# Altium PCB PCB1.PcbDoc
Units mm, origin at the board's own origin, x right, y up, seen from the top; angles counter-clockwise.
Board outline 152.4 x 101.6 mm, 4 copper layers (Top Layer, Int1 (GND), Int2 (PWR), Bottom Layer), stack 1.578 mm thick; 124 components, 98 nets, 497 pads, 2 vias.
Unrouted connection lines stored in the file: 278.
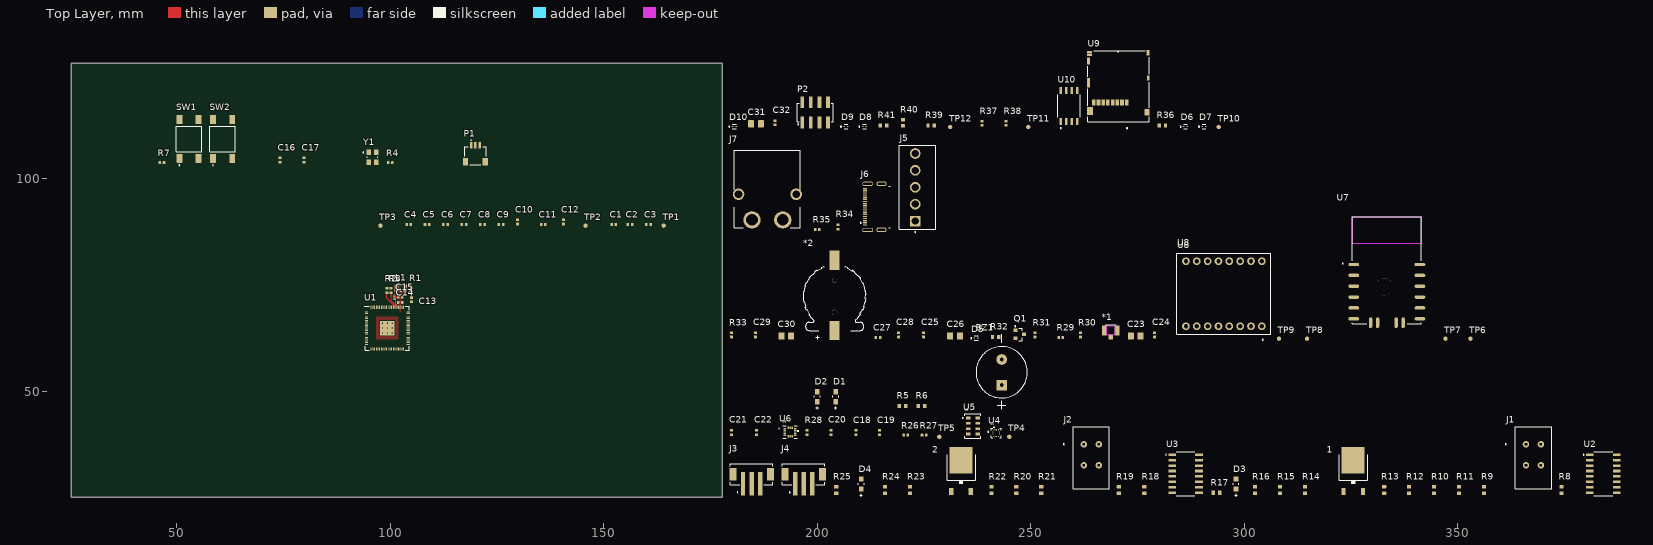
[diagram p0: Top Layer view]
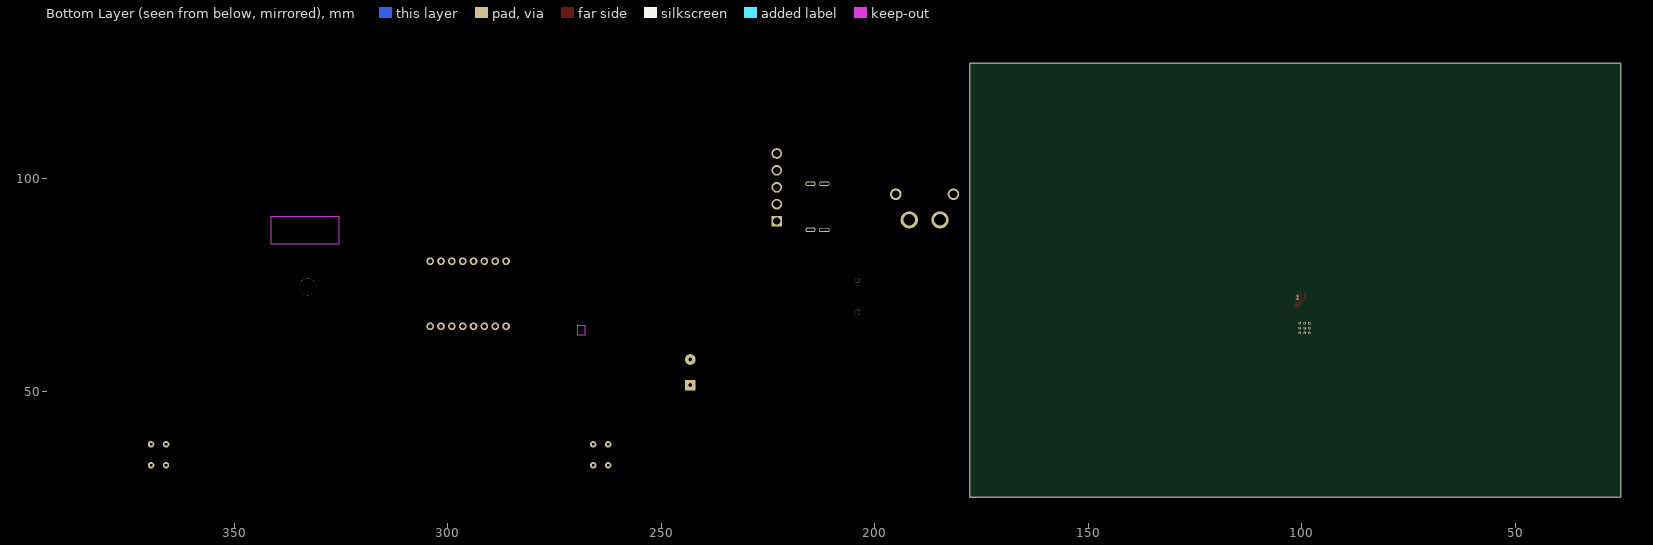
[diagram p1: Bottom Layer view, seen from below]

## Layer stack, top to bottom
Top Solder: solder mask 0.0254, SM-001, Dk 4
Top Layer: signal copper 0.035
Dielectric 1: prepreg 0.107, PP-017, Dk 4.1
Dielectric 2: prepreg 0.0994, PP-017, Dk 4.1
Int1 (GND): signal copper 0.0152
Dielectric 3: core 1.065, Core-039, Dk 4.6
Int2 (PWR): signal copper 0.0152
Dielectric 4: prepreg 0.0994, PP-017, Dk 4.1
Dielectric 5: prepreg 0.107, PP-017, Dk 4.1
Bottom Layer: signal copper 0.035
Bottom Solder: solder mask 0.0254, SM-001, Dk 4

## Board outline
25.4,25.4 177.8,25.4 177.8,127 25.4,127

## Design rules (kind name [scope] priority, off if disabled: settings)
BoardOutlineClearance [All] p1: gap=0.2 ignorepadtopadclearanceinfootprint=FALSE
Clearance [All] p1: gap=0.102 ignorepadtopadclearanceinfootprint=FALSE except(0.127: Arc-Via Track-Via SMDPad-Via THPad-Via Via-Via Via-Fill Via-Poly Via-Region Via-Text; 0.2: Fill-Fill Fill-Poly Fill-Region Poly-Poly Poly-Region Region-Region; 0.25: Arc-Hole Track-Hole SMDPad-Hole THPad-Hole Via-Hole Fill-Hole Poly-Hole Region-Hole Text-Hole)
ComponentClearance [All] p1: gap=0.102 collisioncheckmode=3 verticalgap=0.102 showdistances=TRUE
DiffPairsRouting [All] p1: maxlimit=0.102 minlimit=0.102 mostfreqgap=0.102 toplayer_minwidth=0.102 toplayer_maxwidth=1816.048 toplayer_prefwidth=0.102 midlayer1_minwidth=0.102 midlayer1_maxwidth=1816.048 midlayer1_prefwidth=0.102 midlayer2_minwidth=0.102 midlayer2_maxwidth=1816.048 midlayer2_prefwidth=0.102 bottomlayer_minwidth=0.102 bottomlayer_maxwidth=1816.048 bottomlayer_prefwidth=0.102 maxuncoupledlength=12.7
Height [All] p1: minheight=0 maxheight=1816.048 prefheight=12.7
HoleSize [All] p1: absolutevalues=TRUE maxlimit=6.3 minlimit=0.2 maxpercent=80.000 minpercent=20.000
HoleToHoleClearance [All] p1: gap=0.25 allowstackedmicrovias=FALSE
MinimumAnnularRing [All] p1: minimumring=0.076
MinimumSolderMaskSliver [All] p1: minsoldermaskwidth=0
PlaneClearance [All] p1: clearance=0.102
PlaneConnect PlaneConnectPowerPads [InPadClass('PowerPads')] p1: planeconnectstyle=Direct reliefexpansion=0.508 reliefentries=4 reliefconductorwidth=0.254 reliefairgap=0.254
PlaneConnect [All] p2: pad.planeconnectstyle=Relief pad.reliefexpansion=0.3 pad.reliefentries=4 pad.reliefconductorwidth=0.102 pad.reliefairgap=0.102 via.planeconnectstyle=Direct via.reliefexpansion=0.3 via.reliefentries=4 via.reliefconductorwidth=0.127 via.reliefairgap=0.127
PolygonConnect PolygonConnectPowerPads [All vs (InPadClass('PowerPads'))] p1: connectstyle=Direct reliefconductorwidth=0.254 reliefentries=4 polygonreliefangle="90 Angle" airgapwidth=0.254
PolygonConnect [All] p2: thpad.connectstyle=Relief thpad.reliefconductorwidth=0.102 thpad.reliefentries=4 thpad.polygonreliefangle="90 Angle" thpad.airgapwidth=0.102 smdpad.connectstyle=Direct smdpad.reliefconductorwidth=0.102 smdpad.reliefentries=4 smdpad.polygonreliefangle="90 Angle" smdpad.airgapwidth=0.102 via.connectstyle=Direct via.reliefconductorwidth=0.127 via.reliefentries=4 via.polygonreliefangle="90 Angle" via.airgapwidth=0.127
RoutingVias [All] p1: holewidth=0.2 width=0.45 viastyle="Through Hole" minholewidth=0.2 minwidth=0.45 maxholewidth=6.3 maxwidth=6.55
SilkToSilkClearance [All] p1: silktosilkclearance=0
SilkToSolderMaskClearance [IsPad] p1: minsilkscreentomaskgap=0.102 clearancetoexposedcopper=TRUE
SolderMaskExpansion [All] p1: expansion=0.075 istentingtop=FALSE
SupplyNets "Schematic Supply Nets_5" [InNet('+BATT')] p1: voltage=0.000
SupplyNets "Schematic Supply Nets_4" [InNet('+5')] p2: voltage=0.000
SupplyNets "Schematic Supply Nets_3" [InNet('GND')] p3: voltage=0.000
SupplyNets "Schematic Supply Nets_2" [InNet('+5H')] p4: voltage=0.000
SupplyNets "Schematic Supply Nets_1" [InNet('+1V1')] p5: voltage=0.000
SupplyNets "Schematic Supply Nets" [InNet('+3V3')] p6: voltage=0.000
Width [All] p1: maxlimit=1816.048 minlimit=0.102 preferedwidth=0.254 midlayer1_prefwidth=0.102 midlayer2_prefwidth=0.102 minimp=50.000000 maximp=50.000000 favimp=50.000000
20 further rules are at their usual default settings.

## Classes and differential pairs
component class storage: C23 C24 D9 D10 P2 R11 R22 R34 R37 R38 R41 TP10 TP11 TP12 U3 U9
component class Sheet2: J5 J6 J7 R34 R41
component class Sheet1: *2 C22 C23 C24 C26 D9 Q1 R15 R18 R19 R30 R31 TP6 TP7 TP9 U1 U7 U8
component class Microcontroller: BZ1 C1 C2 C3 C4 C5 C6 C7 C8 C9 C10 C11 C12 C13 C14 C15 C16 C17 D1 D2 L1 P1 R1 R2 R3 R4 R5 R6 R7 SW1 SW2 TP1 TP2 TP3 U1 Y1
component class MCU_SLAVES: C18 C19 C20 C21 C22 R12 R27 R28 TP4 TP5 U7 U8
component class "Firing channels": 1 2 D3 D10 J1 J2 J3 J4 R11 R12 R15 R16 R18 R19 R22 R23 R27 R28 R31 R34 R37 R41 U2 U3
differential pair USB_D: +USB_D_P -USB_D_N
differential pair MCU_USB_D: +MCU_USB_D_P -MCU_USB_D_N

## Components (designator, comment, footprint, x,y, rotation, side; value= is the part's Value field where it differs from the comment)
1 "" IRLR7843 325.12,31.242 r0 top
2 "IRL_MOSFET" IRLR7843 233.299,31.242 r0 top
*1 "ufl" UFL 268.605,64.135 r0 top
*2 "CR1202_HOLDER" CR1220_CELL_HOLDER 206.883,69.342 r0 top
BZ1 "Buzzer_Active_THT" Buzzer_Active_Tht 243.205,54.61 r90 top
C1 "100n" CAP_0402#1 152.375,89.197 r0 top
C2 "4.7u" CAP_0402#1 156.185,89.197 r0 top
C3 "100n" CAP_0402#1 160.503,89.197 r0 top
C4 "100n" CAP_0402#1 104.369,89.197 r0 top
C5 "100n" CAP_0402#1 108.687,89.197 r0 top
C6 "100n" CAP_0402#1 113.005,89.197 r0 top
C7 "100n" CAP_0402#1 117.323,89.197 r0 top
C8 "100n" CAP_0402#1 121.641,89.197 r0 top
C9 "100n" CAP_0402#1 125.959,89.197 r0 top
C10 "100n" CAP_0402#1 129.896,89.832 r90 top
C11 "100n" CAP_0402#1 135.865,89.197 r0 top
C12 "100n" CAP_0402#1 140.564,89.832 r90 top
C13 "4.7u" CAP_0402#1 105.029,71.62 r270 top
C14 "4.7u" CAP_0402#2 102.4,71 r0 top
C15 "4.7u" CAP_0402#1 102.375,72.225 r0 top
C16 "C0402" CAP_0402#1 74.27,104.31 r90 top
C17 "C0402" CAP_0402#1 79.858,104.31 r90 top
C18 "100nf" CAP_0402#1 209.042,40.513 r90 top
C19 "100nf" CAP_0402#1 214.63,40.513 r90 top
C20 "100nf" CAP_0402#1 203.2,40.513 r90 top
C21 "100nf" CAP_0402#1 179.959,40.513 r90 top
C22 "100nf" CAP_0402#1 185.801,40.513 r90 top
C23 "10u" CAP_0805 274.574,63.119 r0 top
C24 "100nf" CAP_0402#1 279.019,63.373 r90 top
C25 "100nf" CAP_0402#1 224.917,63.373 r90 top
C26 "10uf" CAP_0805 232.283,63.119 r0 top
C27 "DNP" CAP_0402#1 214.249,62.738 r0 top
C28 "DNP" CAP_0402#1 219.075,63.373 r90 top
C29 "100nf" CAP_0402#1 185.547,63.373 r90 top
C30 "4.7uf" CAP_0805 192.786,63.119 r0 top
C31 "1uf" CAP_0805 185.674,112.776 r0 top
C32 "100nf" CAP_0402#1 190.119,113.03 r90 top
D1 "APT2012MGC" FP-APT2012MGC-MFG 204.343,48.895 r90 top
D2 "APT2012MGC" FP-APT2012MGC-MFG 200.025,48.895 r90 top
D3 "APT2012MGC" FP-APT2012MGC-MFG 298.069,28.448 r90 top
D4 "APT2012MGC" FP-APT2012MGC-MFG 210.312,28.448 r90 top
D5 "ESD9L5.0ST5G" On_Semiconductor_514AB_MFG 237.236,62.611 r0 top
D6 "ESD9L5.0ST5G" On_Semiconductor_514AB_MFG 286.258,112.141 r0 top
D7 "ESD9L5.0ST5G" On_Semiconductor_514AB_MFG 290.576,112.141 r0 top
D8 "ESD9L5.0ST5G" On_Semiconductor_514AB_MFG 211.074,112.141 r0 top
D9 "ESD9L5.0ST5G" On_Semiconductor_514AB_MFG 206.756,112.141 r0 top
D10 "ESD9L5.0ST5G" On_Semiconductor_514AB_MFG 180.594,112.141 r0 top
J1 "WAGO_2_PIN_CONNECTOR" WAGO_CONNECTOR 368.046,33.782 r0 top
J2 "WAGO_2_PIN_CONNECTOR" WAGO_CONNECTOR 264.541,33.782 r0 top
J3 "3_PIN_JST_PH_SERVO" 3_PIN_JST_PH_SERVO 184.912,29.718 r0 top
J4 "3_PIN_JST_PH_SERVO" 3_PIN_JST_PH_SERVO 197.104,29.718 r0 top
J5 "B5P-VH-B(LF)(SN)" FP-B5P-VH-B_LF_SN-MFG 223.52,97.917 r90 top
J6 "CX90M-16P" FP-CX90M-16P-MFG 214.249,93.345 r90 top
J7 "XT60PW-M" XT60PWM 188.341,90.297 r0 top
L1 "3.3uH" IND-SMD_L2.0-W1.6_AOTA-B201610S3R3-101-T 102.5,74.35 r180 top
P1 "SM03B-SRSS-TB(LF)(SN)" JST-SM03B-SRSS-TB_V 119.99,105.326 r0 top
P2 "621008245821" 621008245821 199.517,115.443 r0 top
Q1 "BC817-40LT1G" ONSC-SOT-23-3-318-08_V 247.396,63.5 r0 top
R1 "33" RES_0402 105.029,73.914 r90 top
R2 "27" RES_0402 99.25,73.775 r270 top
R3 "27" RES_0402 100.25,73.775 r270 top
R4 "1k" RES_0402 100.051,103.675 r0 top
R5 "R0603" RES_0603 219.964,46.736 r0 top
R6 "R0603" RES_0603 224.409,46.736 r0 top
R7 "1k" RES_0402 46.584,103.675 r0 top
R8 "R0603" RES_0603 374.269,27.051 r90 top
R9 "R0603" RES_0603 356.108,27.051 r90 top
R10 "R0603" RES_0603 344.424,27.051 r90 top
R11 "R0603" RES_0603 350.266,27.051 r90 top
R12 "R0603" RES_0603 338.582,27.051 r90 top
R13 "1k" RES_0603 332.74,27.051 r90 top
R14 "R0603" RES_0603 314.198,27.051 r90 top
R15 "R0603" RES_0603 308.356,27.051 r90 top
R16 "100" RES_0603 302.514,27.051 r90 top
R17 "10k" RES_0603 293.497,26.416 r0 top
R18 "R0603" RES_0603 276.606,27.051 r90 top
R19 "R0603" RES_0603 270.637,27.051 r90 top
R20 "R0603" RES_0603 246.634,27.051 r90 top
R21 "R0603" RES_0603 252.476,27.051 r90 top
R22 "1k" RES_0603 240.792,27.051 r90 top
R23 "R0603" RES_0603 221.742,27.051 r90 top
R24 "100" RES_0603 215.9,27.051 r90 top
R25 "10k" RES_0603 204.47,27.051 r90 top
R26 "10k" RES_0402 220.726,39.878 r0 top
R27 "10k" RES_0402 225.044,39.878 r0 top
R28 "10k" RES_0402 197.612,40.513 r90 top
R29 "0 ohm" RES_0402 257.048,62.738 r0 top
R30 "0 ohm" RES_0402 261.62,63.373 r90 top
R31 "4.7k" RES_0402 250.952,63.373 r90 top
R32 "0ohm-NM" RES_0603 241.808,62.865 r0 top
R33 "47k" RES_0402 179.959,63.373 r90 top
R34 "5K1" RES_0402 204.851,88.646 r90 top
R35 "5K1" RES_0402 200.025,88.011 r0 top
R36 "10k" RES_0603 280.797,112.395 r0 top
R37 "1k" RES_0402 238.633,112.903 r90 top
R38 "DNF" RES_0402 244.221,112.903 r90 top
R39 "22 ohm" RES_0603 226.695,112.395 r0 top
R40 "22 ohm" RES_0603 220.091,113.03 r90 top
R41 "22 ohm" RES_0603 215.519,112.395 r0 top
SW1 "FSM4JSMA" TE_FSM4JSMA 52.934,109.263 r90 top
SW2 "FSM4JSMA" TE_FSM4JSMA 60.808,109.263 r90 top
TP1 "TEST_POINT_RND_1MM" PAD_RND_1MM 164.059,88.943 r90 top
TP2 "TEST_POINT_RND_1MM" PAD_RND_1MM 145.771,88.943 r90 top
TP3 "TEST_POINT_RND_1MM" PAD_RND_1MM 97.765,88.943 r90 top
TP4 "TEST_POINT_RND_1MM" PAD_RND_1MM 244.983,39.497 r90 top
TP5 "TEST_POINT_RND_1MM" PAD_RND_1MM 228.6,39.497 r90 top
TP6 "TEST_POINT_RND_1MM" PAD_RND_1MM 352.933,62.484 r90 top
TP7 "TEST_POINT_RND_1MM" PAD_RND_1MM 347.091,62.484 r90 top
TP8 "TEST_POINT_RND_1MM" PAD_RND_1MM 314.706,62.484 r90 top
TP9 "TEST_POINT_RND_1MM" PAD_RND_1MM 308.102,62.484 r90 top
TP10 "TEST_POINT_RND_1MM" PAD_RND_1MM 294.005,112.014 r90 top
TP11 "TEST_POINT_RND_1MM" PAD_RND_1MM 249.428,112.014 r90 top
TP12 "TEST_POINT_RND_1MM" PAD_RND_1MM 231.14,112.014 r90 top
U1 "RP2350_80QFN" RP2350-QFN-80-1EP_10x10_P0.4mm_EP3.4x3.4mm_ThermalVias 99.379,64.962 r0 top
U2 "TLP281-4_OPTOCOUPLER" TLP281-4_OPTOCOUPLER 383.286,29.083 r0 top
U3 "TLP281-4_OPTOCOUPLER" TLP281-4_OPTOCOUPLER 285.496,29.083 r0 top
U4 "BMP390" BMP390 242.062,40.386 r0 top
U5 "MS5611" MS5611 236.728,41.021 r0 top
U6 "LSM6DSO32TR" LSM6DSO32TR 194.183,40.386 r0 top
U7 "L89HAS90" XCVR_L89HAS90 333.375,78.486 r0 top
U8 "LORA_SX1262_HF" LORA_SX1262_HF 284.226,63.5 r0 top
U9 "SD CARD SOCKET" "SD CARD SOCKET" 272.034,116.84 r0 top
U10 "W25Q128JVSIQ" SOIC127P790X216-8N 258.953,116.967 r90 top
Y1 "ABM8-272-T3" XTAL_ABM8-272-T3 95.86,104.945 r0 top

## Footprints (in the part's own frame and the unit in brackets; to place one, negate y for a bottom-side part, rotate by r counter-clockwise, add the part's x,y. Pads: shape width x height; smd on the part's side, far side on the other; paste and mask are expansions set on the pad)
3_PIN_JST_PH_SERVO [mm]
  rect 1x5.5 smd: 1(-2.254,-1.234) 2(-0.254,-1.234) 3(1.746,-1.234)
  rect 1.6x3 smd: S1(-4.654,1.016) S2(4.146,1.016)
  silkscreen extent -5.23,-3.33 4.72,3.52, body extent -5.23,-1.48 4.72,5.52, height 6.6
621008245821 [mm] "Pin Header, pitch 2.00 mm, SMD, Vertical, dual row, 8p"
  rect 0.89x2.75 smd: 1(-3,-2.375) 2(-3,2.375) 3(-1,-2.375) 4(-1,2.375) 5(1,-2.375) 6(1,2.375) 7(3,-2.375) 8(3,2.375)
  silkscreen extent -4.2,-2.9 4.2,2.12, body extent -4,-3.1 4,3.1, height 4.7
BMP390 [mil]
  rect 11x10 smd paste+0 mask+0: 1(-36,9.84) 2(-36,-9.84) 6(26,-9.84) 7(26,9.84)
  rect 10x11 smd paste+0 mask+0: 3(-24.68,-31) 4(-5,-31) 5(14.68,-31) 8(14.68,31) 9(-5,31) 10(-24.68,31)
  silkscreen extent -85,-46 40,56, body extent -46,-41 36,41, height 32
Buzzer_Active_Tht [mm]
  rect 2.5x2.5 / inner round 2.5 / far side rect 2.5x2.5 hole 0.9: 1(-3,0) 1(-3,0)
  round 2.5 hole 0.9: 2(3,0) 2(3,0)
  silkscreen extent -8.69,-6 8.92,6
CAP_0402#1 [mm]
  rrect25% 0.6x0.7 smd: 1(-0.5,0) 2(0.5,0)
  body extent -0.5,-0.26 0.5,0.26, height 0.37
CAP_0402#2 [mm]
  rrect25% 0.6x0.7 smd mask+0: 1(-0.5,0) 22(0.5,0)
  body extent -0.5,-0.26 0.5,0.26, height 0.37
CAP_0805 [mm]
  rrect25% 1.4x1.7 smd: 1(-1.143,0) 2(1.143,0)
  body extent -1.15,-0.76 1.15,0.79, height 1.01
CR1220_CELL_HOLDER [mm]
  rect 2.3x4.5 smd: N(-2.794,11.473) P(-2.794,-4.927)
  round 1.3 hole 1.3 unplated: ""(-2.794,-0.677)
  round 1.05 hole 1.05 unplated: ""(-2.794,6.773)
  silkscreen extent -10.17,-6.95 4.58,10.01, body extent -10.17,-6.55 4.58,12.65, height 4.25
FP-APT2012MGC-MFG [mm]
  rect 1.25x1.1 smd paste+0 mask+0: 1(-1.175,0) 2(1.175,0)
  silkscreen extent -2.93,-0.67 0.18,0.67, body extent -1.9,-0.77 1.9,0.77, height 0.25
FP-B5P-VH-B_LF_SN-MFG [mm]
  rect 2.5x2.5 hole 1.65 paste-2539.97 mask+0: 1(-7.92,0.55)
  round 2.5 hole 1.65 paste-2539.97 mask+0: 2(-3.96,0.55) 3(0,0.55) 4(3.96,0.55) 5(7.92,0.55)
  silkscreen extent -10.59,-4.25 9.87,4.25, body extent -9.97,-4.35 9.97,4.35, height 0.25
FP-CX90M-16P-MFG [mm]
  rect 0.3x0.9 smd paste+0 mask+0: 1(-4.25,3.025) 2(4.25,3.025) A1(-3.75,3.025) A4(-2.75,3.025) A5(-1.75,3.025) A6(-0.75,3.025) A7(0.75,3.025) A8(1.75,3.025) A9(2.75,3.025) A12(3.75,3.025) B1(3.25,3.025) B4(2.25,3.025) B5(1.25,3.025) B6(0.25,3.025) B7(-0.25,3.025) B8(-1.25,3.025) B9(-2.25,3.025) B12(-3.25,3.025)
  rrect100% 1x2.55 hole 2.05 slot 0.5 at 0 deg paste-2539.97 mask+0: 3(-5.4,2.405) 4(5.4,2.405)
  rrect100% 1.1x2.4 hole 1.8 slot 0.5 at 0 deg paste-2539.97 mask+0: 5(-5.4,-0.825) 6(5.4,-0.825)
  silkscreen extent -4.87,-2.9 4.87,4.2, body extent -6.05,-3.37 6.05,3.78, height 0.25
IND-SMD_L2.0-W1.6_AOTA-B201610S3R3-101-T [mm]
  rect 1x1.6 smd paste+0 mask+0.05: 1(-1,0) 2(1,0)
  silkscreen extent -0.27,-0.8 1.03,1.23
IRLR7843 [mm]
  rect 1x1.6 smd: 1(-1.899,-4.546) 2(2.661,-4.546)
  rect 5.4x6.2 smd: 3(0.381,2.754)
  silkscreen extent -2.9,-2.77 3.66,4.09, body extent -4.57,-3.02 5.33,3.52, height 2.39
JST-SM03B-SRSS-TB_V [mm] "SMD, 3-Leads, Body 5x4.25mm, Pitch 1mm"
  rect 0.6x1.55 smd: 1(-1,2.45) 2(0,2.45) 3(1,2.45)
  rect 1.2x1.8 smd: MP1(-2.3,-1.425) MP2(2.3,-1.425)
  silkscreen extent -2.5,-2.12 2.5,3.67, body extent -2.5,-2.12 2.5,2.83, height 3.25
LORA_SX1262_HF [mm]
  round 1.8 hole 1: 1(19.89,1.88) 2(17.35,1.88) 3(14.81,1.88) 4(12.27,1.88) 5(9.73,1.88) 6(7.19,1.88) 7(4.65,1.88) 8(2.11,1.88) 9(19.89,17.12) 10(17.35,17.12) 11(14.81,17.12) 12(12.27,17.12) 13(9.73,17.12) 14(7.19,17.12) 15(4.65,17.12) 16(2.11,17.12)
  silkscreen extent 0,-1.4 22,19
LSM6DSO32TR [mil]
  rect 22.7x13.84 smd paste+0 mask+4: 1(-67.65,39.53) 2(-67.65,19.84) 3(-67.65,0.16) 4(-67.65,-19.53) 8(27.65,-19.53) 9(27.65,0.16) 10(27.65,19.84) 11(27.65,39.53)
  rect 13.84x22.7 smd paste+0 mask+4: 5(-39.69,-27.65) 6(-20,-27.65) 7(-0.31,-27.65) 12(-0.31,47.65) 13(-20,47.65) 14(-39.69,47.65)
  silkscreen extent -126,-46 57,66, body extent -81,-41 41,61, height 34
MS5611 [mil]
  rect 43x24 smd paste-12 mask+0: 1(-53.31,113.82) 2(-53.31,64.61) 3(-53.31,15.39) 4(-53.31,-33.82) 5(33.31,-33.82) 6(33.31,15.39) 7(33.31,64.61) 8(33.31,113.82)
  silkscreen extent -106,-74 64,154
On_Semiconductor_514AB_MFG [mm]
  rect 0.36x0.25 smd paste+0 mask+0: 1(-0.42,0) 2(0.42,0)
  silkscreen extent -1.3,-0.55 0.43,0.55, body extent -0.7,-0.43 0.7,0.43, height 0.25
ONSC-SOT-23-3-318-08_V [mm] "SOT23, 3-Leads, Body 2.92x1.3mm, Pitch 0.95mm"
  rect 0.9x0.8 smd: 1(-1,0.95) 2(-1,-0.95) 3(1,0)
  silkscreen extent -1.12,-1.46 0.65,2.02, body extent -0.65,-1.46 0.65,1.46, height 1.11
PAD_RND_1MM [mm]
  round 1 smd paste-0.5 mask+0: 1(0,0)
RES_0402 [mm]
  rrect25% 0.6x0.7 smd: 1(-0.5,0) 2(0.5,0)
  body extent -0.5,-0.25 0.5,0.25, height 0.3
RES_0603 [mm]
  rrect25% 0.8x1 smd: 1(-0.75,0) 2(0.75,0)
  body extent -0.8,-0.43 0.8,0.43, height 0.52
RP2350-QFN-80-1EP_10x10_P0.4mm_EP3.4x3.4mm_ThermalVias [mm]
  rrect25% 0.78x0.22 smd: 1(-4.897,3.8) 2(-4.897,3.4) 3(-4.897,3) 4(-4.897,2.6) 5(-4.897,2.2) 6(-4.897,1.8) 7(-4.897,1.4) 8(-4.897,1) 9(-4.897,0.6) 10(-4.897,0.2) 11(-4.897,-0.2) 12(-4.897,-0.6) 13(-4.897,-1) 14(-4.897,-1.4) 15(-4.897,-1.8) 16(-4.897,-2.2) 17(-4.897,-2.6) 18(-4.897,-3) 19(-4.897,-3.4) 20(-4.897,-3.8) 41(4.897,-3.8) 42(4.897,-3.4) 43(4.897,-3) 44(4.897,-2.6) 45(4.897,-2.2) 46(4.897,-1.8) 47(4.897,-1.4) 48(4.897,-1) 49(4.897,-0.6) 50(4.897,-0.2) 51(4.897,0.2) 52(4.897,0.6) 53(4.897,1) 54(4.897,1.4) 55(4.897,1.8) 56(4.897,2.2) 57(4.897,2.6) 58(4.897,3) 59(4.897,3.4) 60(4.897,3.8)
  rrect25% 0.22x0.78 smd: 21(-3.8,-4.897) 22(-3.4,-4.897) 23(-3,-4.897) 24(-2.6,-4.897) 25(-2.2,-4.897) 26(-1.8,-4.897) 27(-1.4,-4.897) 28(-1,-4.897) 29(-0.6,-4.897) 30(-0.2,-4.897) 31(0.2,-4.897) 32(0.6,-4.897) 33(1,-4.897) 34(1.4,-4.897) 35(1.8,-4.897) 36(2.2,-4.897) 37(2.6,-4.897) 38(3,-4.897) 39(3.4,-4.897) 40(3.8,-4.897) 61(3.8,4.897) 62(3.4,4.897) 63(3,4.897) 64(2.6,4.897) 65(2.2,4.897) 66(1.8,4.897) 67(1.4,4.897) 68(1,4.897) 69(0.6,4.897) 70(0.2,4.897) 71(-0.2,4.897) 72(-0.6,4.897) 73(-1,4.897) 74(-1.4,4.897) 75(-1.8,4.897) 76(-2.2,4.897) 77(-2.6,4.897) 78(-3,4.897) 79(-3.4,4.897) 80(-3.8,4.897)
  rect 1.133x1.133 smd: 81(-1.133,-1.133) 81(-1.133,0) 81(-1.133,1.133) 81(0,-1.133) 81(0,0) 81(0,1.133) 81(1.133,-1.133) 81(1.133,0) 81(1.133,1.133)
  round 0.6 hole 0.25: 81(-1.133,-1.133) 81(-1.133,0) 81(-1.133,1.133) 81(0,-1.133) 81(0,0) 81(0,1.133) 81(1.133,-1.133) 81(1.133,0) 81(1.133,1.133)
  rrect21% 1.2x1.2 on Top Paste: Un1(-0.7,0.7) Un2(-0.7,-0.7) Un3(0.7,0.7) Un4(0.7,-0.7)
  silkscreen extent -5.39,-5.15 5.15,5.15
"SD CARD SOCKET" [mil]
  rect 33x56 smd paste+0 mask+0: 1(17.36,37.53) 2(-25.94,37.53) 3(-69.25,37.53) 4(-112.56,37.53) 5(-155.87,37.53) 6(-199.17,37.53) 7(-242.48,37.53) 8(-285.79,37.53)
  rect 46x19 smd paste+0 mask+0: 9(-323.78,503.08)
  rect 44x19 smd paste+0 mask+0: 10(-324.76,477.09)
  rect 55x73 smd paste+0 mask+0: 11(-319.84,-43.18)
  rect 28x86 smd paste+0 mask+0: 12(-333.62,217.84)
  rect 28x65 smd paste-32.5 mask-32.5: 13(-333.62,417.84)
  rect 28x53 smd paste-26.5 mask-26.5: 14(213.62,494.22)
  rect 25x47 smd paste-23.5 mask-23.5: 15(214.61,260.95)
  rect 48x61 smd paste-30.5 mask-30.5: 16(203.58,-53.02)
  silkscreen extent -344,-205 224,513
SOIC127P790X216-8N [mm]
  rrect25% 1.61x0.58 smd: 1(-3.605,1.905) 2(-3.605,0.635) 3(-3.605,-0.635) 4(-3.605,-1.905) 5(3.605,-1.905) 6(3.605,-0.635) 7(3.605,0.635) 8(3.605,1.905)
  silkscreen extent -5.31,-2.64 2.64,2.64, body extent -3.95,-2.64 3.95,2.64, height 2.16
TE_FSM4JSMA [mm]
  rrect15% 2.1x1.38 smd: 1(-4.55,2.24) 2(4.55,2.24) 3(-4.55,-2.24) 4(4.55,-2.24)
  silkscreen extent -6.25,-3 3,3, body extent -5,-3 5,3, height 5.07
TLP281-4_OPTOCOUPLER [mm]
  rect 1.8x0.59 smd: 1(-2.393,6.223) 2(-2.393,4.953) 3(-2.393,3.683) 4(-2.393,2.413) 5(-2.393,1.143) 6(-2.393,-0.127) 7(-2.393,-1.397) 8(-2.393,-2.667) 9(3.917,-2.667) 10(3.917,-1.397) 11(3.917,-0.127) 12(3.917,1.143) 13(3.917,2.413) 14(3.917,3.683) 15(3.917,4.953) 16(3.917,6.223)
  silkscreen extent -3.94,-3.37 2.96,6.93, body extent -2.74,-3.37 4.26,6.93, height 2.1
UFL [mm]
  rect 1.1x2.25 smd: 1(-1.348,0.254) 2(1.602,0.254)
  rect 1.05x1.1 smd: 3(0.127,-1.296)
  Keep-Out Layer region: 1.027,-0.709 -0.776,-0.709 -0.776,1.404 1.027,1.404
  silkscreen extent -1.17,1.55 1.43,1.55, body extent -1.37,-1.3 1.63,1.8, height 1.25
WAGO_CONNECTOR [mm]
  round 1.524 hole 0.5 square: 1(-2.1,3.95) 3(1.4,3.95) 4(1.4,-0.95)
  round 1.5 hole 0.5 square: 2(-2.1,-0.95)
  silkscreen extent -6.9,-6.4 3.9,8.1, body extent -5.3,-8.38 3.95,8.2, height 12.76
XCVR_L89HAS90 [mm]
  oval 2.5x0.8 smd: 1(-7.75,1.35) 2(-7.75,-1.19) 3(-7.75,-3.73) 4(-7.75,-6.27) 5(-7.75,-8.81) 6(-7.75,-11.35) 7(7.75,-11.35) 8(7.75,-8.81) 9(7.75,-6.27) 10(7.75,-3.73) 11(7.75,-1.19) 12(7.75,1.35)
  oval 0.8x2.5 smd: 13(-3.81,-12.25) 14(-2.17,-12.25) 15(2.17,-12.25) 16(3.81,-12.25)
  round 4 hole 4 unplated: ""(-0.6,-3.87)
  Keep-Out Layer region: 8,6.25 -8,6.25 -8,12.5 8,12.5
  Keep-Out Layer region: 8,6.25 -8,6.25 -8,12.5 8,12.5
  silkscreen extent -10.4,-12.55 8.05,12.55, body extent -9.49,-12.5 8.91,13.9, height 7.25
XT60PWM [mm]
  round 4.05 hole 2.7: 1(-3.6,0) 2(3.6,0)
  round 2.7 hole 1.8: 3(6.75,6) 4(-6.75,6)
  silkscreen extent -7.75,-1.85 7.75,16.35, body extent -7.95,-1.98 7.95,16.3, height 8.44
XTAL_ABM8-272-T3 [mm]
  rect 1.05x1.3 smd: 1(-0.875,1.15) 2(-0.875,-1.15) 3(0.875,-1.15) 4(0.875,1.15)
  silkscreen extent -2.24,-0.09 1.25,1.25, body extent -1.25,-1.6 1.25,1.6, height 0.7

## Part data
1: library part IRL_MOSFET
C1 C2 C3 C4 C5 C6 C7 C8 C9 C10 C11 C12 C13 C14 C15 C16 C17 C18 C19 C20 C21 C22 C24 C25 C27 C28 C29 C32: library part CAP_0402, "Capacitor SMD 0402"
C23 C26 C30 C31: library part CAP_0805, "Capacitor SMD 0805"
D1 D2 D3 D4: library part CMP-44529-000017-1, "LED GREEN CLEAR CHIP SMD", Case Code (Imperial)=0805, Case Code (Metric)=2012, Color=Green, Forward Current=20mA, Forward Voltage=2.1V, Lens Color=Colorless, Max Operating Temperature=85°C, Min Operating Temperature=-40°C, Package Quantity=2000, Power Rating=75mW, Case/Package=0805, Dominant Wavelength=570nm, Height=0.75mm, Illumination Color=Green, Lead Free="Lead Free", Length=2mm, Lens Style=Clear, Lens Transparency=Clear, Luminous Intensity=70mcd, Mount="Surface Mount", Packaging="Tape and Reel", Test Current=20mA, Viewing Angle=120°, Width=1.25mm
D5 D6 D7 D8 D9 D10: library part CMP-1063-00114-2, Breakdown Voltage=5.4V, Capacitance=500fF, Case/Package=SOD-923-2, Clamping Voltage=9.8V, Leakage Current=1µA, Manufacturer Lifecycle Status=ACTIVE, Max Junction Temperature (Tj)=150°C, Max Surge Current=1A, Min Operating Temperature=-55°C, Operating Supply Voltage=5V, Peak Pulse Power=150mW, Power Line Protection=No, Reverse Breakdown Voltage=5.8V, Test Current=1mA, Composition=Zener, Contact Plating=Tin, Depth=600µm, Direction=Unidirectional, Element Configuration=Single, ESD Protection=Yes, Halogen Free="Halogen Free", Height=400µm, Lead Free="Lead Free", Length=800µm, Lifecycle Status=Production, Max Breakdown Voltage=5.4V, Max Operating Temperature=150°C, Max Reverse Leakage Current=1µA, Min Breakdown Voltage=5.4V, NexarPartId=6987432, Number of Channels=1, Number of Elements=1, Number of Lines=1, Number of Pins=2, Number of Unidirectional Channels=1, Packaging="Tape and Reel", Peak Pulse Current=1A, Polarity=Unidirectional, Power Dissipation=150mW, Radiation Hardening=No, REACH SVHC="No SVHC", Reverse Standoff Voltage=5V, RoHS=Compliant, Schedule B=8536300000, Termination=SMD/SMT, Width=650µm, Working Voltage=5V
J5: library part CMP-17439-000483-1, "CONN HEADER VERT 5POS 3.96MM", Color=White, Contact Resistance=20mR, Flammability Rating="UL94 V-0", Insulation Color=Natural, Max Current Rating=10A, Max Operating Temperature=85°C, Max Voltage Rating (AC)=250V, Min Operating Temperature=-25°C, Connector Type=Header, Contact Finish - Mating=TIN, Contact Material=Brass, Contact Plating=Copper, Contact Shape=Square, Contact Type="Male Pin", Depth=8.5mm, Fastening Type=Ramp, Housing Color=White, Insulation Material=PBT, Lead Free="Lead Free", Length=19.74mm, Number of Pins=5, Number of Positions=5, Number of Rows=1, Orientation=Straight, Packaging=Bulk, Pitch=3.96mm, Series=VH, Termination=Solder, Voltage Rating=250V
J6: library part CMP-11601-000005-1, "CONN RCPT USB2.0 TYPEC 16POS SMD", Current Rating=1.25A, Flammability Rating="UL94 V-0", Insulation Color=Black, Max Operating Temperature=85°C, Min Operating Temperature=-30°C, Connector Type=USB, Contact Plating=Gold, Gender=Receptacle, Mating Cycles=10000, Mount="Surface Mount", Number Of Contacts=16, Number of Ports=1, Packaging="Cut Tape", Shielding=Shielded, Termination=Solder
J7: "Connector", Manufacturer_Name="Changzou Amass Elec", Datasheet Link=https://www.tme.eu/Document/9b8d0c5eb7094295f3d3112c214d3ade/XT60PW%20SPEC.pdf, Height=8.4mm, Manufacturer_Part_Number=XT60PW-M
L1: library part AOTA-B201610S3R3-101-T, Current - Saturation(Isat)=2.4A, Current Rating=2.1A, DC Resistance(DCR)=115mΩ, JLCPCB Part Class="Extended Part", LCSC Part Name="3.3uH 2.4A", Manufacturer=ABRACON, Add into BOM=yes, Convert to PCB=yes, Datasheet=https://item.szlcsc.com/datasheet/AOTA-B201610S3R3-101-T/44392932.html, Device=AOTA-B201610S3R3-101-T, Manufacturer Part=AOTA-B201610S3R3-101-T, Supplier=LCSC, Supplier Footprint=0806, Supplier Part=C42411119, Symbol=AOTA-B201610S3R3-101-T, Type="Molded Inductor"
P1: library part CMP-2000-07077-1, "Male Header, Pitch 1 mm, 1 x 3 Position, Height 2.9 mm, -25 to 85 degC, RoHS, Tape and Reel", Manufacturer=JST, Package Description="Male Header, Pitch 1 mm, 1 x 3 Position, Height 2.9 mm", Package Reference=SM03B-SRSS-TB, Datasheet URL=https://datasheet.ciiva.com/26894/getdatasheetpartid-708885-26894671.pdf, Datasheet Version=11/2010, Manufacturer URL=http://www.jst.com/home2.html, Mounting Technology=SurfaceMount, No of Positions=3, Pitch=1mm, Style/Orientation=RightAngleHeader/Plug, Termination=Crimp, Type=ShroudedHeader
P2: library part CMP-1502-00997-4, "SMT Vertical Pin Header WR-PHD, Pitch 2.00 mm, Dual Row, 8 pins", Contact Resistance=20mΩ, Current Rating=2A, Operating Supply Voltage=200V, Gender=Male, Lead Pitch=2mm, Number of Pins=8, Orientation=Vertical, RoHS=Non-Compliant
Q1: library part CMP-1048-00019-1, "General Purpose Transistor, NPN Silicon, 3-Pin SOT-23, Pb-Free, Tape and Reel", Manufacturer="On Semiconductor", ComponentLink1Description="Manufacturer URL", ComponentLink1URL=http://www.onsemi.com/, ComponentLink2Description=Datasheet, ComponentLink2URL=http://www.onsemi.com/pub_link/Collateral/BC817-16LT1-D.PDF, ComponentLink3Description="Package Specification", ComponentLink3URL=http://www.onsemi.cn/pub_link/Collateral/318-08.PDF, DatasheetVersion="Rev. 12", fT Min (MHz)=100, IC Continuous (A)=0.5, Mounting Technology="Surface Mount", PackageDescription="3-Pin Small Outline Transistor, Body 2.92 x 1.3 mm, Pitch 0.95 mm", PackageReference=SOT-23-3-318-08, PackageVersion="Rev. AP, 11/2009", Packing="Tape and Reel", PartNumber=BC817-40LT1G, Polarity=NPN, RoHS=TRUE
R1 R2 R3 R4 R7 R26 R27 R28 R29 R30 R31 R33 R34 R35 R37 R38: library part RES_0402, "Resistor SMD 0402"
R5 R6 R8 R9 R10 R11 R12 R13 R14 R15 R16 R17 R18 R19 R20 R21 R22 R23 R24 R25 R32 R36 R39 R40 R41: library part RES_0603, "Resistor SMD 0603"
SW1 SW2: "Tactile Switch SPST-NO Top Actuated Surface Mount", Package=None, Check_prices=https://www.snapeda.com/parts/FSM-4J-SMA/TE+Connectivity+ALCOSWITCH+Switches/view-part/?ref=eda, MF="TE Connectivity", MP=FSM-4J-SMA, SnapEDA_Link=https://www.snapeda.com/parts/FSM-4J-SMA/TE+Connectivity+ALCOSWITCH+Switches/view-part/?ref=snap
TP1 TP2 TP3 TP4 TP5 TP6 TP7 TP8 TP9 TP10 TP11 TP12: library part CMP-019-000001-1, "Test Point Round 1mm (NO BOM)", Design Item ID=TEST_POINT_RND_1MM, Source=Schematic-Lib-PhilsLab.SchLib
U7: "L89 is a high performance IRNSS-enabled GNSS module, capable of acquiring and tracing GPS, IRNSS, GLONASS, BeiDou, Galileo and QZSS signals.", Package="Custom Quectel", Check_prices=https://www.snapeda.com/parts/L89HAS90/Quectel/view-part/?ref=eda, Digi-Key_Part_Number=2958-L89HA-S90TR-ND, MF=Quectel, MP=L89HAS90, Purchase-URL=https://pricing.snapeda.com/search/part/L89HAS90/?ref=eda, SnapEDA_Link=https://www.snapeda.com/parts/L89HAS90/Quectel/view-part/?ref=snap
U10: "FLASH - NOR Memory IC 128Mb (16M x 8) SPI - Quad I/O, QPI, DTR 133 MHz 8-SOIC", Package="SOIC-8 Winbond Electronics", Check_prices=https://www.snapeda.com/parts/W25Q128JVSIQ/Winbond/view-part/?ref=eda, MF="Winbond Electronics", MP=W25Q128JVSIQ, SnapEDA_Link=https://www.snapeda.com/parts/W25Q128JVSIQ/Winbond/view-part/?ref=snap
Y1: "12 MHz Â±30ppm Crystal 10pF 50 Ohms 4-SMD, No Lead", Package="NON-STANDARD-4 Abracon", Check_prices=https://www.snapeda.com/parts/ABM8-272-T3/Abracon/view-part/?ref=eda, MF=ABRACON, MP=ABM8-272-T3, SnapEDA_Link=https://www.snapeda.com/parts/ABM8-272-T3/Abracon/view-part/?ref=snap

## Via types
v1: diameter 0.6, hole 0.25, Top Layer to Bottom Layer, 2 vias

## Nets (pads, with @x,y where several pads share a name; then routed paths per layer and width w, separated by ;. In a path a pad name is that pad's centre, name@x,y a point inside that pad or via, vN(x,y) a via of type N, cw(c..) or ccw(c..) an arc to the next point about the centre after c; other vN are vias at no path point)
+1V1: C1.1 C2.1 C3.1 C15.1 L1.2 TP1.1 U1.10 U1.32 U1.51 U1.65 | length 2.4
  Top Layer w0.2: 101.375,72.125 101.375,70.634 101.569,70.44 101.569,69.869 U1.65
  other v1: 100.95,71.85 100.95,72.525
+3V3: C4.1 C5.1 C6.1 C7.1 C8.1 C9.1 C10.1 C11.1 C12.1 C14.1 C18.2 C19.2 C20.2 C21.2 C22.1 C23.2 C24.2 C25.2 C26.2 C31.2 C32.2 D5.1 D10.1 J5.1 P2.4 R1.2 R6.2 R26.2 R27.2 R32.1 R36.2 R38.2 TP2.1 TP3.1 TP4.1 TP6.1 TP9.1 TP10.1 TP12.1 U1.5 U1.15 U1.24 U1.29 U1.41 U1.50 U1.59 U1.60 U1.64 U1.68 U1.69 U1.76 U4.1 U4.10 U5.1 U5.2 U6.5 U6.8 U7.4 U8.16 U9.4 U10.8
+5: J5.2 J6.A4 J6.A9 J6.B4 J6.B9
+5H: J3.2 J4.2 J5.3
+BATT: J1.2 J2.2 J7.1 R10.2 R20.2
BMP390_CS: R28.2 TP5.1 U4.6
BUZZER_CTRL: U1.8
CS_LORA: U8.3
EXT_ANT: C28.2 R30.2 U7.11
EXTANT_STATUS: TP8.1 U7.8
GND: 1.2 2.2 *1.1 *1.2 C1.2 C2.2 C3.2 C4.2 C5.2 C6.2 C7.2 C8.2 C9.2 C10.2 C11.2 C12.2 C13.2 C14.22 C15.2 C16.2 C17.2 C18.1 C19.1 C20.1 C21.1 C22.2 C23.1 C24.1 C25.1 C26.1 C27.1 C28.1 C31.1 C32.1 D1.2 D2.2 D3.2 D4.2 D5.2 D6.2 D7.2 D8.2 D9.2 D10.2 J6.A1 J6.A12 J6.B1 J6.B12 J7.2 P1.2 P1.MP1 P1.MP2 P2.6 R7.2 R15.1 R17.1 R23.1 R25.1 R28.1 R33.1 R34.2 R35.2 SW2.1 SW2.2 U1.62 U1.81 U2.2 U2.4 U2.6 U2.8 U3.2 U3.4 U4.3 U4.8 U4.9 U5.3 U5.4 U5.5 U6.2 U6.3 U6.6 U6.7 U7.3 U7.7 U7.12 U8.2 U8.9 U8.10 U8.15 U9.6 U9.11 U9.12 U9.13 U9.14 U9.15 U9.16 U10.4 Y1.2 Y1.4
GPS_RST: R31.1
I2C0_SCL: J5.4 R26.1 U1.2 U5.8 U7.15
I2C0_SDA: J5.5 R27.1 U1.1 U5.7 U7.16
LORA_RST: U8.7
LORA_STATUS: U8.8
LSM_CS: U6.12
MCU_ARM: R5.2
MCU_OSC_IN: C16.1 U1.30 Y1.1
MCU_OSC_OUT: R4.1 U1.31
MCU_RST: SW1.3 SW1.4 U1.35
MCU_SWCLK: P1.1 U1.33
MCU_SWD: P1.3 U1.34
MCU_USB_D_N: R3.2 U1.66 | length 3.8
  Top Layer w0.2: R3.2 100.25,71.332 101.169,70.413 101.169,69.869 U1.66
MCU_USB_D_P: R2.2 U1.67 | length 4
  Top Layer w0.2: R2.2 99.25,71.906 100.769,70.387 100.769,69.869 U1.67
MOS_1_CON: R10.1 U2.16
MOS_1_CTRL: R16.1 U2.15
MOS_2_CON: R20.1 U2.14
MOS_2_CTRL: R24.1 U2.13
MOS_3_CON: U2.12
MOS_3_CTRL: U2.11
MOS_4_CON: U2.10
MOS_4_CTRL: U2.9
MOS_5_CON: U3.16
MOS_5_CTRL: U3.15
MOS_6_CON: U3.14
MOS_6_CTRL: U3.13
Net1_1: 1.1 R16.2 R17.2
Net1_3: 1.3 J1.4 R11.1 R13.2
Net2_1: 2.1 R24.2 R25.2
Net2_3: 2.3 J2.4 R21.1 R22.2
Net*1_3: *1.3 R29.1
Net*2_N: *2.N C29.1 C30.1
NetC13_1: C13.1 R1.1 U1.61
NetC27_2: C27.2 R29.2 R30.1
NetD1_1: D1.1 R6.1
NetD2_1: D2.1 R5.1
NetD3_1: D3.1 R13.1
NetD4_1: D4.1 R22.1
NetD6_1: D6.1 R39.2 U9.3
NetD8_1: D8.1 R41.2 U9.7
NetD9_1: D9.1 R40.2 U9.5
NetJ6_A5: J6.A5 R34.1
NetJ6_B5: J6.B5 R35.1
NetL1_1: L1.1 U1.63
NetQ1_1: Q1.1 R31.2
NetQ1_2: Q1.2 R33.2
NetR7_1: R7.1 SW1.1 SW1.2
NetR8_2: R8.2 U2.1
NetR9_2: R9.2 U2.3
NetR12_2: R12.2 U2.5
NetR14_2: R14.2 U2.7
NetR18_2: R18.2 U3.1
NetR19_2: R19.2 U3.3
PYRO_1: R8.1
PYRO_2: R9.1
PYRO_3: R12.1
PYRO_4: R14.1
PYRO_CONT_1: R11.2 R15.2
PYRO_CONT_2: R21.2 R23.2
QSPI_SCLK: U1.71 U10.6
QSPI_SD0: U1.70 U1.72 U1.73 U1.74 U10.5
QSPI_SD1: U10.2
QSPI_SD2: U10.3
QSPI_SD3: U10.7
QSPI_SS: R37.1 R38.1 U1.75 U10.1
RESET_CTRL: Q1.3 U7.10
SD_CS: D7.1 P2.2 R36.1 TP11.1 U9.2
SERVO_1: R18.1
Servo_1_neg: J3.1
Servo_1_pwm: J3.3
SERVO_2: R19.1
Servo_2_neg: J4.1
Servo_2_pwm: J4.3
SPI0_MISO: U1.16 U4.5 U6.1
SPI0_MOSI: U1.19 U4.4 U6.14
SPI0_SCK: U1.18 U4.2 U6.13
SPI1_MISO: P2.7 R41.1 U8.6
SPI1_MOSI: P2.3 R39.1 U8.5
SPI1_SCK: P2.5 R40.1 U8.4
Status: U7.9
UART_RX: U7.2
UART_TX: U7.1
USB_BOOT: R37.2 SW2.3 SW2.4
USB_D_N: J6.A7 J6.B7 R3.1
USB_D_P: J6.A6 J6.B6 R2.1
V_BACKUP: *2.P C29.2 C30.2 R32.2 TP7.1 U7.5
XTAL_IN: C17.1 R4.2 Y1.3
pads on no net: *2. BZ1.1 BZ1.2 J1.1 J1.3 J2.1 J2.3 J3.S1 J3.S2 J4.S1 J4.S2 J6.1 J6.2 J6.3 J6.4 J6.5 J6.6 J6.A8 J6.B8 J7.3 J7.4 P2.1 P2.8 U1.3 U1.4 U1.6 U1.7 U1.9 U1.11 U1.12 U1.13 U1.14 U1.17 U1.20 U1.21 U1.22 U1.23 U1.25 U1.26 U1.27 U1.28 U1.36 U1.37 U1.38 U1.39 U1.40 U1.42 U1.43 U1.44 U1.45 U1.46 U1.47 U1.48 U1.49 U1.52 U1.53 U1.54 U1.55 U1.56 U1.57 U1.58 U1.77 U1.78 U1.79 U1.80 U1.Un1 U1.Un2 U1.Un3 U1.Un4 U3.5 U3.6 U3.7 U3.8 U3.9 U3.10 U3.11 U3.12 U4.7 U5.6 U6.4 U6.9 U6.10 U6.11 U7. U7.6 U7.13 U7.14 U8.1 U8.11 U8.12 U8.13 U8.14 U9.1 U9.8 U9.9 U9.10

## Polygon pours and split planes (outlines as drawn)
+1V1 on Top Layer "+1V1_L01_P006" (solid, pour order 6): 101,75.15 102,75.15 102.125,75.025 102.125,71.875 101.575,71.875 101.575,72.875 101,73.35 101,73.6
+1V1 on Top Layer "+1V1_L01_P018" (solid, pour order 18): 102.075,72.475 101.325,72.475 101.1,72.7 100.775,72.7 100.675,72.6 100.675,71.8 100.775,71.6 101.084,71.6 101.325,71.825 102.075,71.825
no net on Top Layer "F.Cu-+1V1" (solid, pour order 16): 101.979,62.362 96.779,62.362 96.779,67.562 101.979,67.562
NetL1_1 on Top Layer "Top Layer-NetL1_1" (solid, pour order 5): 102.47,68.825 102.495,68.85 102.495,72.9 102.645,73.05 103.5,73.05 104,73.55 104,75.15 103,75.15 103,73.85 102.27,73.12 102.27,68.825

## Text inside footprints (layer, text, board x,y; h text height)
U6: Top 3D Body "*" at 192.385,41.005 h1.27
U9: Top 3D Body "*" at 272.034,115.824 h1.27